# EAGLE board 7segement4digits1badidea-max7219-smd-mk-3.0 (EAGLE 6.5.0)
VERSION: v1.0
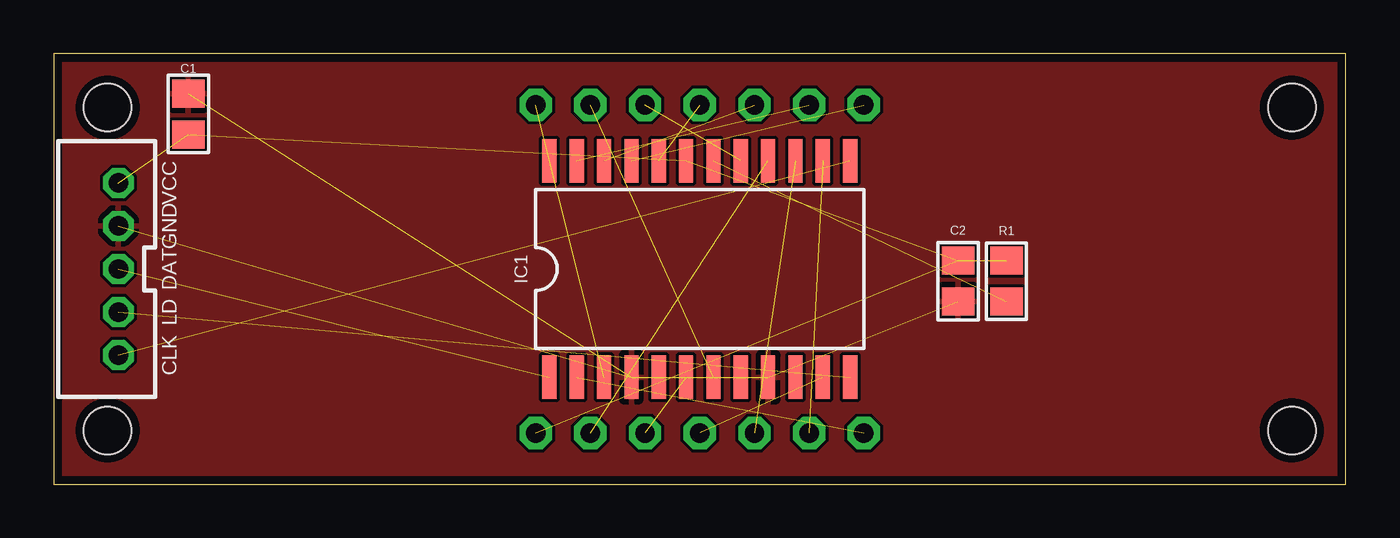
[diagram p0: board, top side]
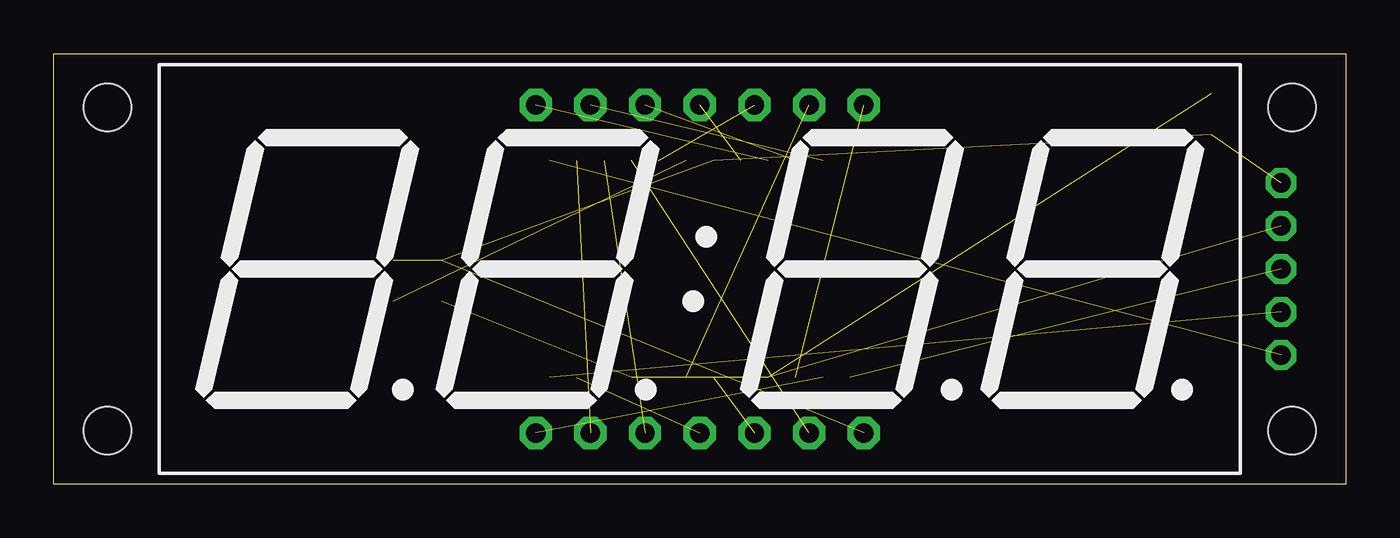
[diagram p1: board, bottom side, seen from below]

Size 60 x 20 mm. Coordinates in mm from the lower left corner, seen from the top.
Outline: 0,20 0,0 60,0 60,20 0,20
Copper layers (1*16): Top 0.0356mm / dielectric 1.5011mm / Bottom 0.0356mm
Design rules "LaenPCBOrder2": minimum track width 6mil, minimum drill 13mil, track to track 6mil, track to pad 6mil, pad to pad 6mil, via to via 6mil, smd to smd 6mil, copper to edge 15mil, drill to drill 6mil, minimum pad ring 7mil, minimum via ring 7mil, stop-mask expansion 3mil, vias tented up to drill 20mil, thermal gap 10mil
Holes 2.2 mm at 2.5,17.5 2.5,2.5 57.5,2.5 57.5,17.5

## Footprints (pad centres in the part's own frame; a part is rotated, then mirrored left to right if it is on the bottom)
C0805 = smd 1.3 x 1.5: 1 -0.95,0; 2 0.95,0
7SEG_4DIG = drill 0.9 pad 1.5 octagon: P$1 -7.62,7.62; P$2 -5.08,7.62; P$3 -2.54,7.62; P$4 0,7.62; P$5 2.54,7.62; P$6 5.08,7.62; P$7 7.62,7.62; P$8 7.62,-7.62; P$9 5.08,-7.62; P$10 2.54,-7.62; P$11 0,-7.62; P$12 -2.54,-7.62; P$13 -5.08,-7.62; P$14 -7.62,-7.62
SO24W = smd 0.66 x 2.032: 1 -6.985,-5.029; 2 -5.715,-5.029; 3 -4.445,-5.029; 4 -3.175,-5.029; 5 -1.905,-5.029; 6 -0.635,-5.029; 7 0.635,-5.029; 8 1.905,-5.029; 9 3.175,-5.029; 10 4.445,-5.029; 11 5.715,-5.029; 12 6.985,-5.029; 13 6.985,5.029; 14 5.715,5.029; 15 4.445,5.029; 16 3.175,5.029; 17 1.905,5.029; 18 0.635,5.029; 19 -0.635,5.029; 20 -1.905,5.029; 21 -3.175,5.029; 22 -4.445,5.029; 23 -5.715,5.029; 24 -6.985,5.029
JST-5-PH-VERT-PTH = drill 0.9 pad 1.4 octagon: 1 -4,0; 2 -2,0; 3 0,0; 4 2,0; 5 4,0
R0805 = smd 1.3 x 1.5: 1 -0.95,0; 2 0.95,0

## Placement (x,y rotation side)
C1  1uF  [C0805]  6.25,17.2 270 top
C2  100nF  [C0805]  42,9.44 270 top
DISPLAY1  7SEG_4DIGIT_COLONADAFRUIT_0.56IN  [7SEG_4DIG]  30,10 0 bottom
FRAME1  FRAME-LETTERNO_PACKAGE  [DUMMY]  0,0 0 top
IC1  MAX7219  [SO24W]  30,10 0 top
JP1  M05JST-PH-VERT-PTH  [JST-5-PH-VERT-PTH]  3,10 90 top
R1  10k  [R0805]  44.25,9.44 90 top

## Library data of the parts
C1 C2 DISPLAY1 IC1 JP1 R1 = A_butts
FRAME1 = A_butts; DESIGNER: Nobody; VERSION: v01

## Nets
A: DISPLAY1.P$13 IC1.14
B: DISPLAY1.P$9 IC1.16
C: DISPLAY1.P$4 IC1.20
CLK: IC1.13 JP1.1
COLON_K: DISPLAY1.P$7 IC1.3
D: DISPLAY1.P$2 IC1.23
DATA: IC1.1 JP1.3
DIG0: DISPLAY1.P$14 IC1.2
DIG1: DISPLAY1.P$11 IC1.11
DIG2: DISPLAY1.P$10 IC1.6
DIG3: DISPLAY1.P$6 IC1.7
DP: DISPLAY1.P$3 IC1.22
E: DISPLAY1.P$1 IC1.21
F: DISPLAY1.P$12 IC1.15
G: DISPLAY1.P$5 IC1.17
GND: C1.1 C2.2 IC1.4 IC1.9 JP1.4
LOAD: IC1.12 JP1.2
N$1: IC1.18 R1.1
VCC: C1.2 C2.1 DISPLAY1.P$8 IC1.19 JP1.5 R1.2

## Tracks (layer width: path | path; a pad name or v marks a point on that pad's centre or on a via)
A  (1 unrouted)
B  (1 unrouted)
C  (1 unrouted)
CLK  (1 unrouted)
COLON_K  (1 unrouted)
D  (1 unrouted)
DATA  (1 unrouted)
DIG0  (1 unrouted)
DIG1  (1 unrouted)
DIG2  (1 unrouted)
DIG3  (1 unrouted)
DP  (1 unrouted)
E  (1 unrouted)
F  (1 unrouted)
G  (1 unrouted)
GND  (4 unrouted)
  pour Top: -0.1,20.1 60.1,20.1 60.1,-0.1 -0.1,-0.1
LOAD  (1 unrouted)
N$1  (1 unrouted)
VCC  (5 unrouted)

## Text on the board
tPlace: VCC | GND | DAT | LD | CLK